# Altium PCB PCB6.PcbDoc
Units mil, origin at the board's own origin, x right, y up, seen from the top; angles counter-clockwise.
Board outline 3825 x 3825.88 mil, 2 copper layers (Top Layer, Bottom Layer); 29 components, 25 nets, 100 pads, 8 vias.
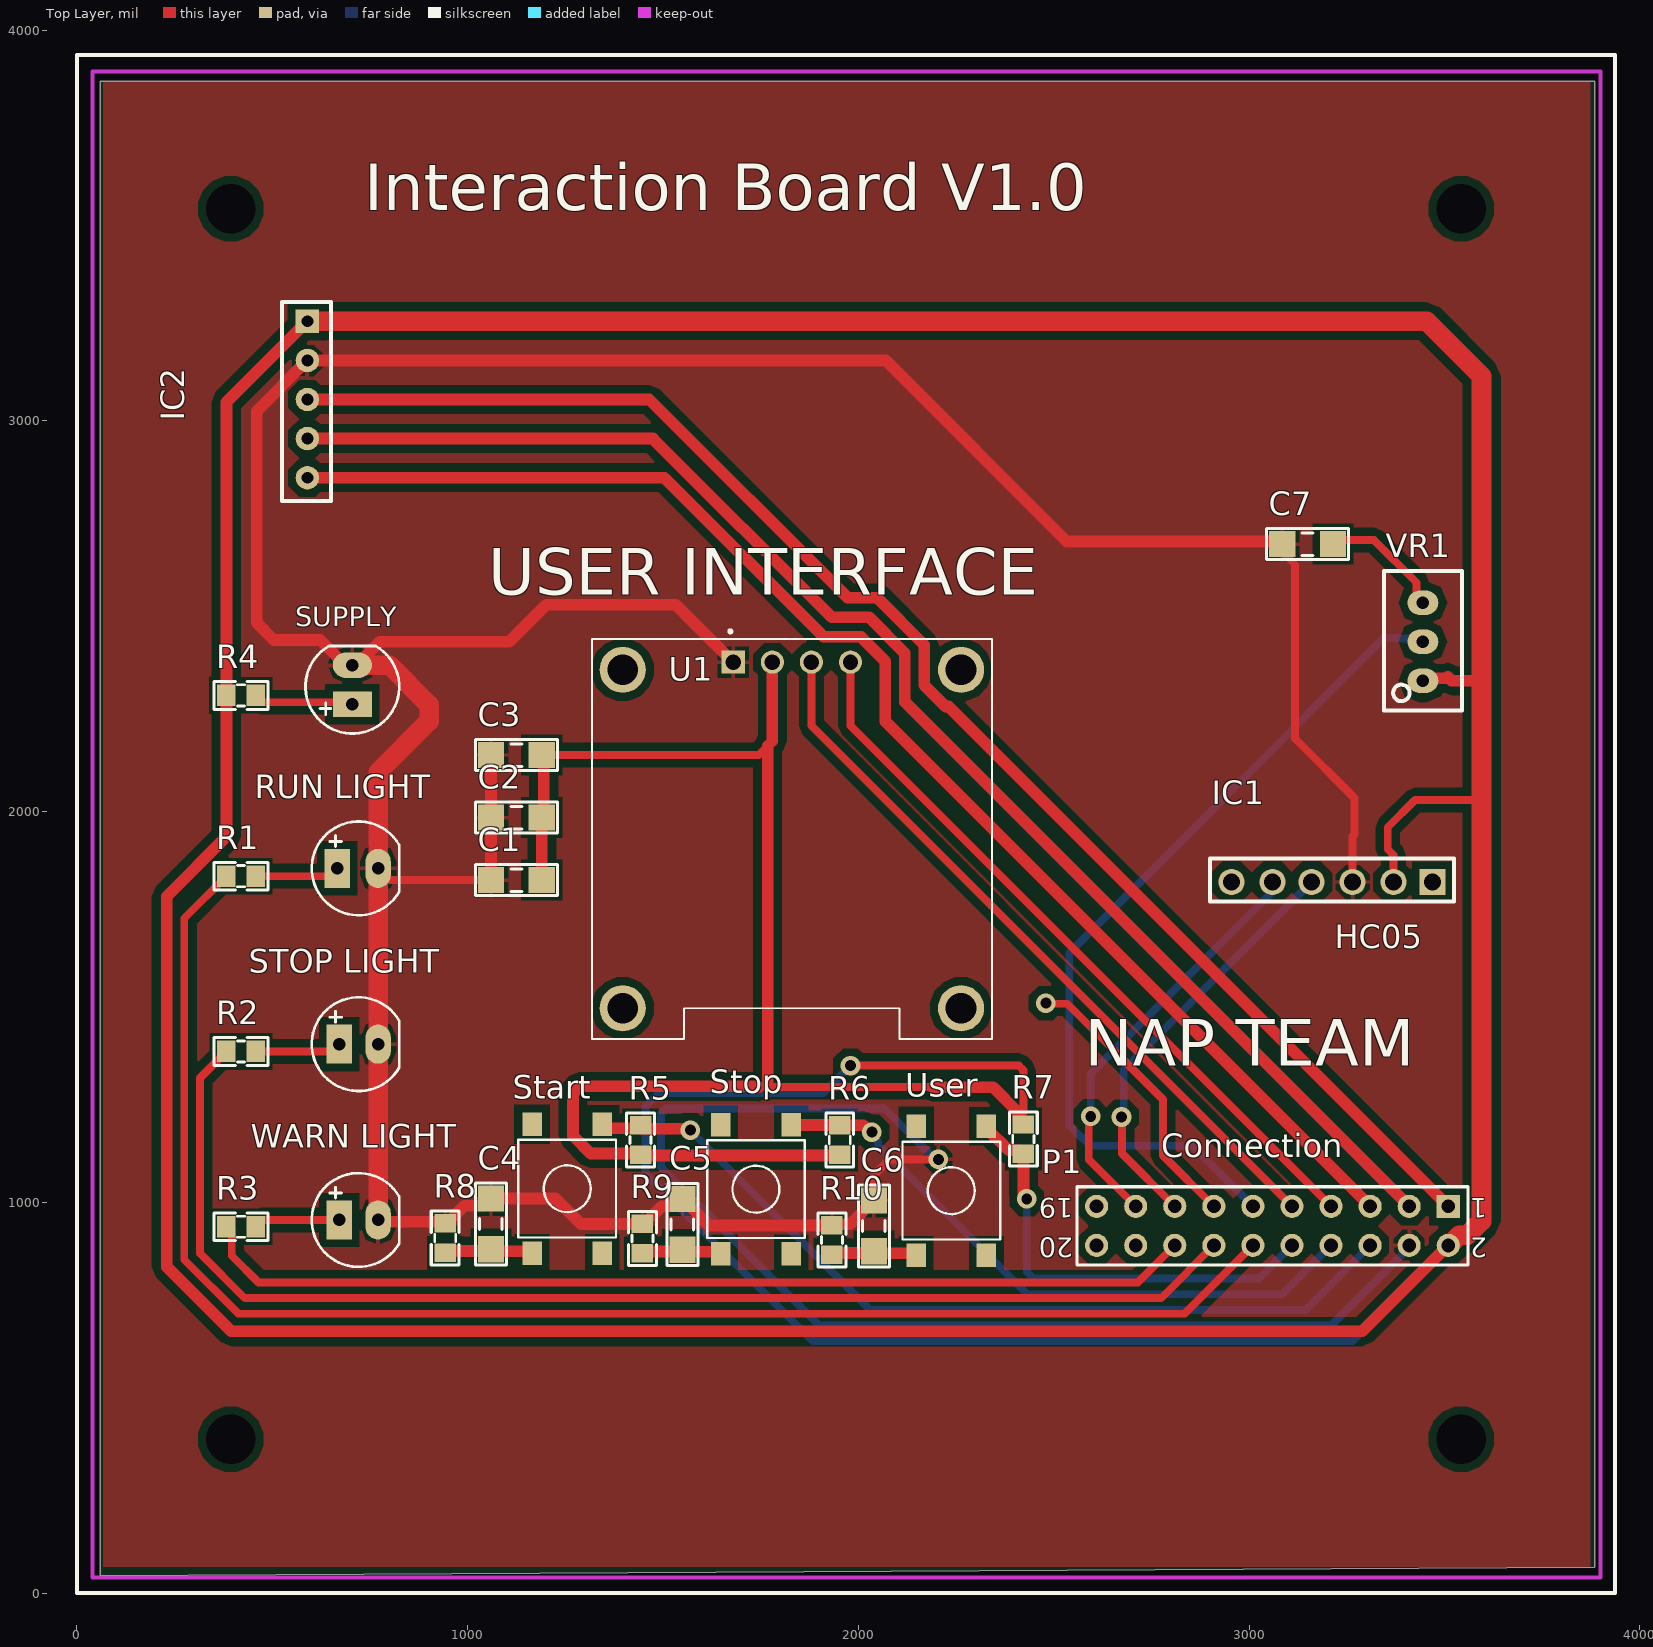
[diagram p0: Top Layer view]
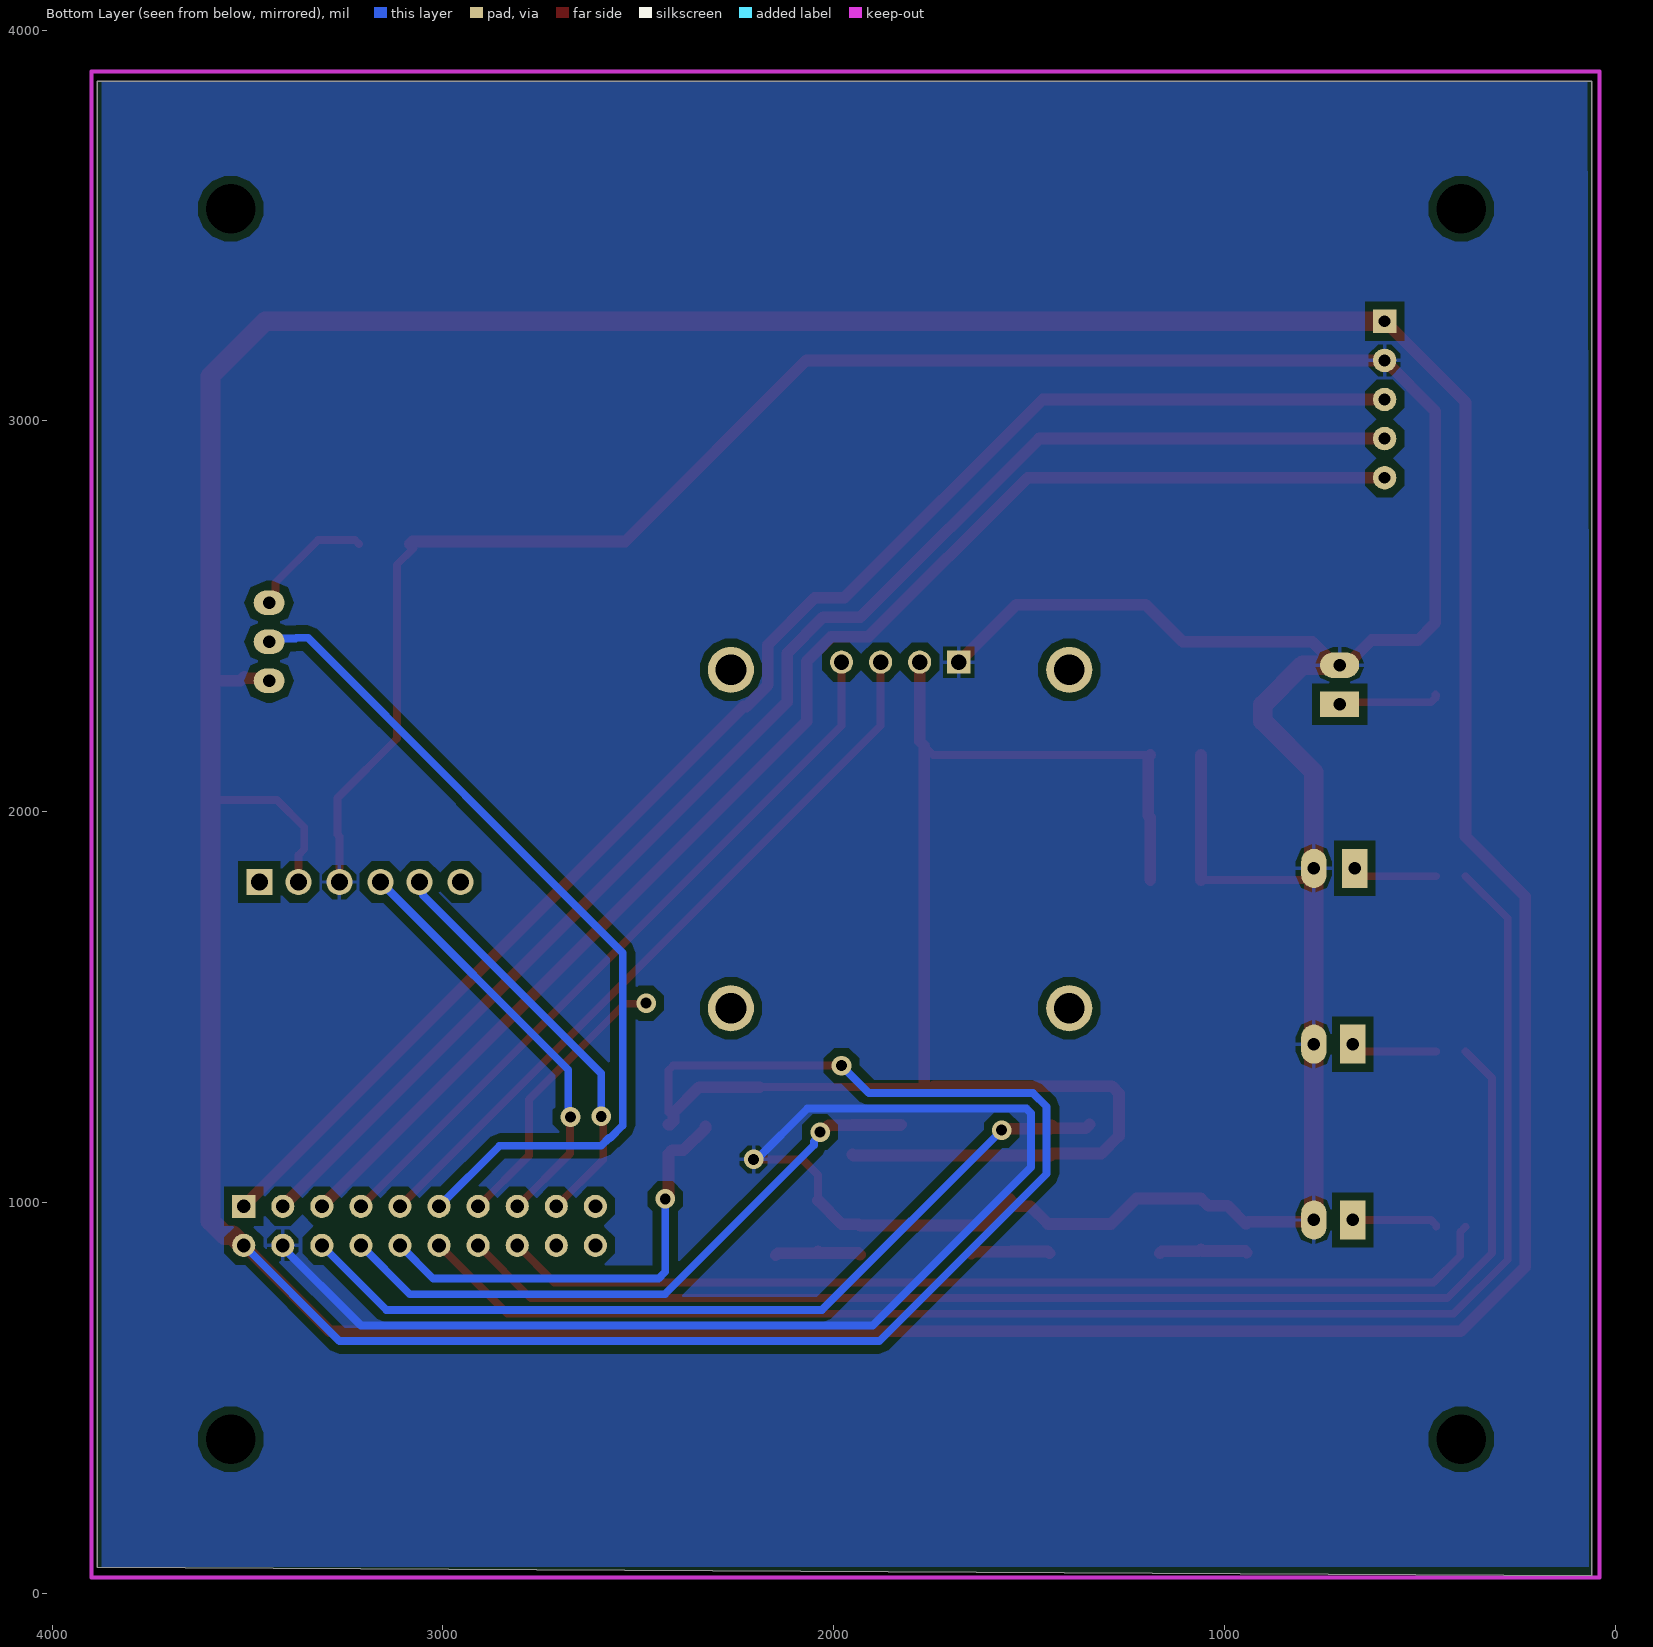
[diagram p1: Bottom Layer view, seen from below]
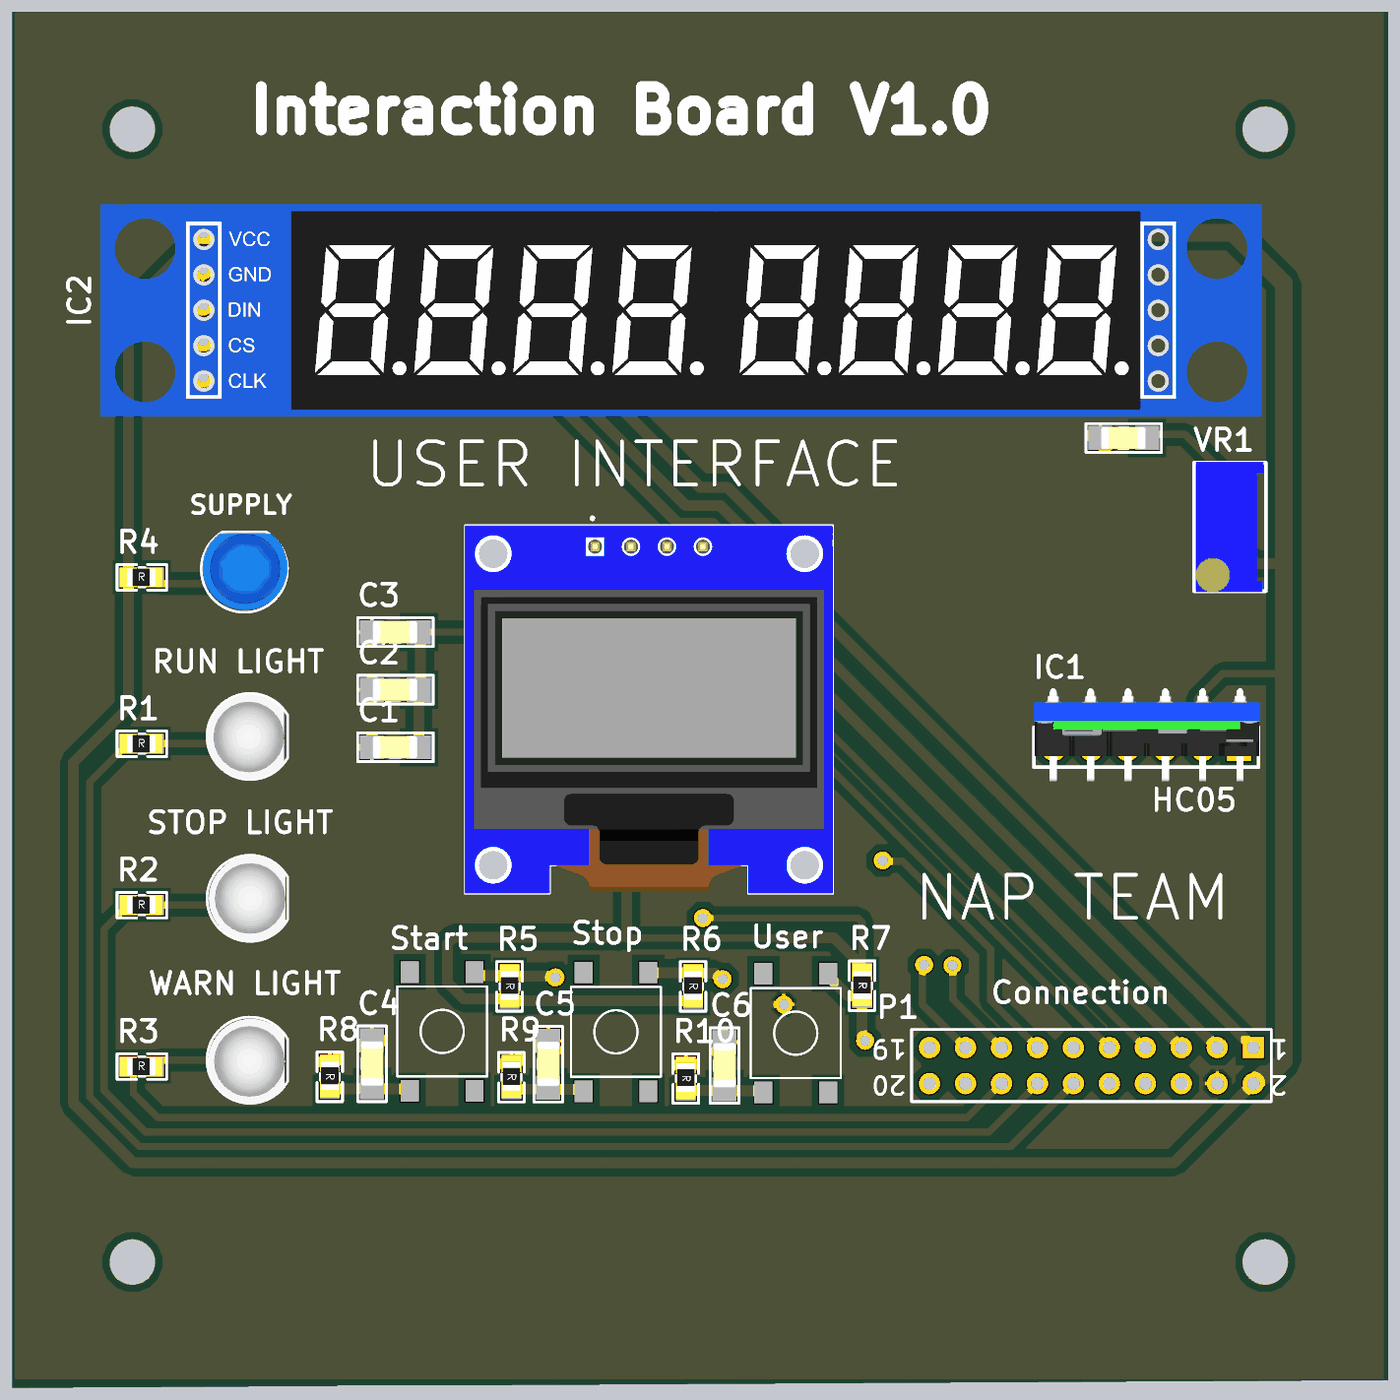
[diagram p2: 3D render of the assembled board from above, using the file's embedded part models]

## Layer stack, top to bottom
Top Solder: solder mask 0.4, Solder Resist, Dk 3.5
Top Layer: signal copper 1.4
Dielectric 1: dielectric 12.6, FR-4, Dk 4.8
Bottom Layer: signal copper 1.4
Bottom Solder: solder mask 0.4, Solder Resist, Dk 3.5

## Board outline
60,44.12 60,3870 3885,3870 3885,65.57

## Design rules (kind name [scope] priority, off if disabled: settings)
Clearance [All] p1: gap=20 ignorepadtopadclearanceinfootprint=FALSE
Height [All] p1: minheight=0 maxheight=3937.01 prefheight=500
PolygonConnect [All] p1: connectstyle=Relief reliefconductorwidth=10 reliefentries=4 polygonreliefangle="90 Angle" airgapwidth=10
RoutingVias [All] p1: holewidth=28 width=50 viastyle="Through Hole" minholewidth=28 minwidth=50 maxholewidth=28 maxwidth=50
SolderMaskExpansion [All] p1: expansion=4 istentingtop=FALSE
Width [All] p1: maxlimit=50 minlimit=20 preferedwidth=30
29 further rules are at their usual default settings.

## Components (designator, comment, footprint, x,y, rotation, side; value= is the part's Value field where it differs from the comment)
C1 "103" "tu 1206" 1125,1825 r180 top
C2 "103" "tu 1206" 1125,1985 r180 top
C3 "103" "tu 1206" 1125,2145 r180 top
C4 "103" "tu 1206" 1060,944.94 r90 top
C5 "103" "tu 1206" 1550,943.77 r90 top
C6 "103" "tu 1206" 2040,940 r90 top
C7 "103" "tu 1206" 3150,2685 r180 top
IC1 "HC05" HC05 3470,1820 r270 top
IC2 "Component_1" PCBComponent_1 590,3255 r0 top
P1 "Header 10X2" HDR2X10 3510,990 r180 top
R1 "330R" "Tro SMD 0805" 420,1837.39 r0 top
R2 "330R" "Tro SMD 0805" 420,1388.7 r0 top
R3 "330R" "Tro SMD 0805" 420,940 r0 top
R4 "330R" "Tro SMD 0805" 420,2300 r0 top
R5 "3.3k" "tro smd 0805" 1445,1160 r270 top
R6 "3.3k" "tro smd 0805" 1955,1160 r270 top
R7 "3.3k" "tro smd 0805" 2425,1162.17 r270 top
R8 "100R" "tro smd 0805" 945,908.83 r270 top
R9 "100R" "tro smd 0805" 1450,907.67 r270 top
R10 "100R" "tro smd 0805" 1935,903.9 r270 top
"RUN LIGHT" "LED 5mm" LED-5MM-Green 671,1855 r0 top
Start "Nut Nhan 4 Chan SMD 6x6" "Nut Nhan 4 Chan SMD 6x6" 1255,1035 r90 top
Stop "Nut Nhan 4 Chan SMD 6x6" "Nut Nhan 4 Chan SMD 6x6" 1738,1033.83 r90 top
"STOP LIGHT" "LED 5mm" LED-5MM-RED 671,1405 r0 top
SUPPLY "LED 5mm" LED-5MM-BLUE 705,2320 r90 top
U1 "DM-OLED096-636" MODULE_DM-OLED096-636 1830,1930 r0 top
User "Nut Nhan 4 Chan SMD 6x6" "Nut Nhan 4 Chan SMD 6x6" 2238,1030.06 r90 top
VR1 "1K" "Bien Tro Vi Chinh Dung" 3445,2435 r90 top
"WARN LIGHT" "LED 5mm" LED-5MM-Yellow 671,955 r0 top

## Footprints (in the part's own frame and the unit in brackets; to place one, negate y for a bottom-side part, rotate by r counter-clockwise, add the part's x,y. Pads: shape width x height; smd on the part's side, far side on the other; paste and mask are expansions set on the pad)
"Bien Tro Vi Chinh Dung" [mm] "Bien tro vi chinh"
  oval 1.6x2 hole 0.8: 1(-2.54,0) 2(0,0) 3(2.54,0)
  silkscreen extent -4.47,-2.54 4.6,2.54, body extent -4.54,-2.4 4.66,2.4, height 12.02
HC05 [mm]
  rect 1.7x1.7 hole 1.1: 1(0,0)
  round 1.7 hole 1.1: 2(0,-2.54) 3(0,-5.207) 4(0,-7.874) 5(0,-10.414) 6(0,-13.081)
  silkscreen extent -1.52,-14.48 1.27,1.4, body extent -4.29,-14.48 2.26,1.52, height 46.5
HDR2X10 [mm] "Connector; Header; 10x2 Position"
  rect 1.5x1.5 hole 0.9: 1(0,0)
  round 1.5 hole 0.9: 2(0,2.54) 3(2.54,0) 4(2.54,2.54) 5(5.08,0) 6(5.08,2.54) 7(7.62,0) 8(7.62,2.54) 9(10.16,0) 10(10.16,2.54) 11(12.7,0) 12(12.7,2.54) 13(15.24,0) 14(15.24,2.54) 15(17.78,0) 16(17.78,2.54) 17(20.32,0) 18(20.32,2.54) 19(22.86,0) 20(22.86,2.54)
  silkscreen extent -1.27,-1.27 24.13,3.81
LED-5MM-BLUE [mil] "LED 2 PIN, 5 ly , Only colour, pin to pin 110mil"
  rect 65x100 hole 32: 1(-45,0)
  oval 65x100 hole 32: 2(55,0)
  silkscreen extent -120,-120 104,120, body extent -113,-120 100,117, height 339
LED-5MM-Green [mil] "LED 2 PIN, 5 ly , Only colour,pin to pin 100mil"
  rect 65x100 hole 32: 1(-5,0)
  oval 65x100 hole 32: 2(100,0)
  silkscreen extent -70,-120 154,120, body extent -69,-120 145,117, height 339
LED-5MM-RED [mil] "LED 2 PIN, 5 ly , Only colour,pin to pin 100mil"
  rect 65x100 hole 32: 1(0,0)
  oval 65x100 hole 32: 2(100,0)
  silkscreen extent -70,-120 154,120, body extent -65,-119 149,118, height 339
LED-5MM-Yellow [mil] "LED 2 PIN, 5 ly , Only colour,pin to pin 100mil"
  rect 65x100 hole 32: 1(0,0)
  oval 65x100 hole 32: 2(100,0)
  silkscreen extent -70,-120 154,120, body extent -67,-122 147,115, height 339
MODULE_DM-OLED096-636 [mm]
  rect 1.508x1.508 / inner round 1.508 / far side rect 1.508x1.508 hole 1: 1(-3.81,11.5)
  round 1.508 hole 1: 2(-1.27,11.5) 3(1.27,11.5) 4(3.81,11.5)
  round 3 hole 2: S1(-11,11) S2(11,11) S3(11,-11) S4(-11,-11)
  silkscreen extent -13,-13 13,13.6, body extent -13,-13 13,13, height 5.66
"Nut Nhan 4 Chan SMD 6x6" [mil] "SW SMD button 4pin, 250 x250 mil"
  rect 60x50 smd: 1(-165,90) 2(165,-90) 3(165,90) 4(-165,-90)
  silkscreen extent -125,-125 125,125, body extent -180,-125 180,125, height 130
PCBComponent_1 [mil]
  round 60 hole 30: CLK(0,-400) CS(0,-300) DIN(0,-200) GND(0,-100)
  rect 60x60 hole 30: VCC(0,0)
  silkscreen extent -65,-460 60,50, body extent -285,-510 2943,80, height 484
"Tro SMD 0805" [mm]
  rect 1.2x1.4 smd: 1(-0.946,-0.061) 2(0.954,-0.061)
  silkscreen extent -1.75,-0.97 1.75,0.84, body extent -1.56,-0.76 1.44,0.64, height 0.53
"tro smd 0805" [mm]
  rect 1.2x1.4 smd: 1(-0.946,-0.061) 2(0.954,-0.061)
  silkscreen extent -1.75,-0.97 1.75,0.84, body extent -1.56,-0.76 1.44,0.64, height 0.53
"tu 1206" [mm]
  rect 1.7x1.7 smd: 1(-1.65,0) 2(1.65,0)
  silkscreen extent -2.67,-1.02 2.67,1.02, body extent -1.57,-0.8 1.63,0.8, height 0.94

## Part data
C1 C2 C3 C4 C5 C6 C7: library part "Tu 1206 103 50V 10%", "Dán", Chung_Loai=Dán, Don_Vi=Con, Ma_Hang=MH004543, So_Chan=2, Ten_Linh_Kien="Tụ 1206 103-10nF 10% 50V"
IC2: "Max 7219 7 segment"
P1: "Header, 10-Pin, Dual row", LatestRevisionDate=17-Jul-2002, LatestRevisionNote="Re-released for DXP Platform.", Publisher="Altium Limited"
R1 R2 R3 R4: library part "Tro 0805 5% 330R", "Dán", Chung_Loai=Dán, Don_Vi=Con, Ma_Hang=MH005337, So_Chan=2, Ten_Linh_Kien="Trở 0805 5% 330R"
R5 R6 R7: library part "Tro 0805 5% 3.3k", "Dán", Chung_Loai=Dán, Don_Vi=Con, Ma_Hang=MH005305, So_Chan=2, Ten_Linh_Kien="Trở 0805 5% 3.3k"
R8 R9 R10: library part "Tro 0805 5% 100R", "Dán", Chung_Loai=Dán, Don_Vi=Con, Ma_Hang=MH005251, So_Chan=2, Ten_Linh_Kien="Trở 0805 5% 100R"
"RUN LIGHT": library part "LED 5mm Xanh La", "Cắm", Chung_Loai=Cắm, Don_Vi=Con, Ma_Hang=MH008969, Ten_Linh_Kien="LED 5MM Phủ Xanh (1000c)"
Start Stop User: "Nut Nhan 4 Chan 6.2x6.2x3.5", Ma_Hang=MH002424, Ten="Nút Nhấn 4 Chân 6.2x6.2x3.1MM SMD"
"STOP LIGHT": library part "LED 5mm Do", "Cắm", Chung_Loai=Cắm, Don_Vi=Con, Ma_Hang=MH008967, Ten_Linh_Kien="Led 5MM Phủ Đỏ (1000c)"
SUPPLY: library part "LED 5mm Xanh Duong", "Cắm", Chung_Loai=Cắm, Don_Vi=Con, Ma_Hang=MH008987, Ten_Linh_Kien="Led 5MM Xanh Dương Đục (1000c)"
U1: "0.96â€ 128 X 64 MONOCHROME GRAPHIC OLED DISPLAY MODULE - I2C", Package=Package, Check_prices=https://www.snapeda.com/parts/DM-OLED096-636/Display+Module/view-part/?ref=eda, MF="Display Module", MP=DM-OLED096-636, SnapEDA_Link=https://www.snapeda.com/parts/DM-OLED096-636/Display+Module/view-part/?ref=snap
VR1: library part "Bien Tro Tinh Chinh 1K Dung", "Cắm", Chung_Loai=Cắm, Don_Vi=Con, Ma_Hang=MH003234, Ten_Linh_Kien="Biến Trở VR 102-1K 3296W"
"WARN LIGHT": library part "LED 5mm Vang", "Cắm", Chung_Loai=Cắm, Don_Vi=Con, Ma_Hang=MH008968, Ten_Linh_Kien="Led 5MM Phủ Vàng (1000c)"

## Free pads (board coordinates)
  round 60 hole 125.98: 2(393.7,393.7) 2(393.7,3543.31) 2(3543.31,393.7) 2(3543.31,3543.31)

## Via types
v1: diameter 50, hole 28, Top Layer to Bottom Layer, 8 vias

## Nets (pads, with @x,y where several pads share a name; then routed paths per layer and width w, separated by ;. In a path a pad name is that pad's centre, name@x,y a point inside that pad or via, vN(x,y) a via of type N, cw(c..) or ccw(c..) an arc to the next point about the centre after c; other vN are vias at no path point)
Buzzer: P1.13 | length 729.4
  Top Layer w20: v1(2480,1510) 2481.57,1508.43 2535,1508.43 2780,1263.43 2780,1120 P1.13
CLK: IC2.CLK P1.5 | length 3582.9
  Top Layer w30: IC2.CLK 1503.58,2855 1911.14,2447.44 2006.79,2447.44 2069.02,2385.22 2069.02,2230.98 P1.5
CS: IC2.CS P1.3 | length 3707.1
  Top Layer w30: IC2.CS 1474.29,2955 1931.85,2497.44 2027.5,2497.44 2119.02,2405.93 2119.02,2280.98 P1.3
Den_Run: P1.12 R1.1 | length 3891
  Top Layer w20: R1.1 275,1727.23 275,853.43 413.43,715 2835,715 P1.12
Den_Stop: P1.14 R2.1 | length 3242.9
  Top Layer w20: R2.1 315,1318.53 315,870 430,755 2775,755 P1.14
Den_Warning: P1.16 R3.1 | length 2561
  Top Layer w20: R3.1 396.39,923.98 396.39,863.61 465,795 2715,795 P1.16
DIN: IC2.DIN P1.1 | length 3835.4
  Top Layer w30: IC2.DIN 1465,3055 1972.56,2547.44 2048.21,2547.44 2169.02,2426.64 2169.02,2324.11 2224.11,2269.02 2230.98,2269.02 3495.47,1004.53 P1.1
GND: "RUN LIGHT.2" "STOP LIGHT.2" "WARN LIGHT.2" C1.2 C2.2 C3.2 C4.2 C5.2 C6.2 C7.2 IC1.3 IC2.GND P1.4 R8.1 R9.1 R10.1 SUPPLY.2 U1.1 | length 12703.7
  Top Layer w20: 771,1855 771,1849.68 791.79,1828.89 797.11,1828.89 801,1825 C1.2 ; C6.2 2040,1070 2080,1110 v1(2205,1110) ; C7.2@3075.02,2674.98 3117.95,2632.05 3117.95,2380 3117.95,2187.05 3270,2035 3270,1941.35 3265,1936.35 IC1.3
  Top Layer w30: 771,955 775.47,950.53 938.14,950.53 R8.1 946.54,946.06 991.91,991.43 1041.54,991.43 C4.2 1225.1,1009.9 1290.1,944.9 R9.1 1451.54,944.9 1496.91,990.27 1531.54,990.27 C5.2 1617.61,941.13 R10.1 1935.55,944.07 1979.11,944.07 C6.2 ; C1.2 C2.2 C3.2 ; U1.1 1532.76,2530 1201.45,2530 1106.45,2435 775.15,2435 715.15,2375 SUPPLY.2 687.5,2375 623.11,2439.39 504.23,2439.39 460,2483.61 460,3025 IC2.GND 2070,3155 2533.53,2691.47 3078.57,2691.47 C7.2
  Top Layer w50: SUPPLY.2@715.15,2375 800,2375 901.79,2273.21 901.79,2231.79 771,2101 771,1855 ; 771,955 771,1405 771,1828.89 771,1849.68
  Bottom Layer w20: v1(2205,1110) 2197.78,1110 2067.78,1240 1506.72,1240 1495,1228.28 1495,1090 1900,685 3210,685 P1.4@3420,895
Input_01: P1.6 R5.1 Start.2 | length 2239.1
  Top Layer w30: Start.2 1355,1190 1435.38,1190 R5.1 ; R5.1@1438.72,1195 1444.89,1188.83 1566.17,1188.83 v1(1570,1185)
  Bottom Layer w20: v1(1570,1185) 2030,725 3145,725 P1.6
Input_02: P1.8 R6.1 Stop.2 | length 1624
  Top Layer w30: Stop.2 1828.8,1198.03 1951.8,1198.03 R6.1 2012.36,1197.23 2029.59,1180 v1(2035,1180)
  Bottom Layer w20: v1(2035,1180) 2035,1171.88 2050.74,1156.14 2050.74,1146.26 2432,765 3085,765 P1.8
Input_03: P1.10 R7.2 User.2 | length 1153.7
  Top Layer w30: User.2 2328,1190.06 2384.85,1133.21 2413.98,1133.21 R7.2 2422.61,1017.39 v1(2431.15,1008.85)
  Bottom Layer w20: v1(2431.15,1008.85) 2431.15,822.42 2448.57,805 3025,805 P1.10
NetC4_1: C4.1 R8.2 Start.1 | length 230.1
  Top Layer w30: R8.2 946.96,875.62 1055.64,875.62 C4.1 1064.99,874.99 1160.01,874.99 Start.1
NetC5_1: C5.1 R9.2 Stop.1 | length 204.5
  Top Layer w30: R9.2 1451.96,874.45 1545.64,874.45 1546.27,873.82 1643.01,873.82 Stop.1
NetC6_1: C6.1 R10.2 User.1 | length 223.1
  Top Layer w30: R10.2 1936.96,870.68 2035.64,870.68 C6.1 2044.99,870.05 2143.01,870.05 User.1
NetC7_1: C7.1 VR1.3 | length 321
  Top Layer w20: C7.1 3224.96,2695 3320,2695 3428.9,2586.1 3428.9,2551.1 VR1.3
NetR1_2: "RUN LIGHT.1" R1.2 | length 216.7
  Top Layer w20: R1.2 646,1835 666,1855
NetR2_2: "STOP LIGHT.1" R2.2 | length 221.2
  Top Layer w20: R2.2 652.3,1386.3 671,1405
NetR3_2: "WARN LIGHT.1" R3.2 | length 222.8
  Top Layer w20: R3.2 457.57,941.38 471.2,955 671,955
NetR4_2: R4.2 SUPPLY.1 | length 263.9
  Top Layer w20: R4.2 460,2300.03 460,2291.24 471.2,2280.05 479.98,2280.05 480.03,2280 700,2280 SUPPLY.1
RX_HC05: IC1.4 P1.15 | length 1088
  Top Layer w20: v1(2673.61,1218.61) 2675,1217.22 2675,1125 P1.15
  Bottom Layer w20: v1(2673.61,1218.61) 2679.35,1224.35 2679.35,1339.35 IC1.4
SCL_Oled: P1.9 U1.3 | length 1902.2
  Top Layer w20: U1.3 1880,2220 2820,1280 P1.9
SDA_Oled: P1.7 U1.4 | length 1902.2
  Top Layer w20: U1.4 1980,2220 P1.7
TX_HC05: IC1.5 P1.17 | length 1084.4
  Top Layer w20: v1(2595,1220) 2590,1225 2590,1110 P1.17
  Bottom Layer w20: v1(2595,1220) 2595,1330 3051.02,1786.02 3051.02,1811.02 IC1.5
Var: P1.11 VR1.2 | length 2240.8
  Bottom Layer w20: P1.11 2855,1145 2595,1145 2575,1165 2572.22,1165 2540,1197.22 2540,1638.43 2942.82,2041.25 2942.82,2042.18 3345.63,2445 3375.49,2445 3377.27,2443.23 3436.77,2443.23 VR1.2
VCC: C1.1 C2.1 C3.1 IC1.2 IC2.VCC P1.2 R4.1 R5.2 R6.2 R7.1 U1.2 VR1.1 | length 19577.8
  Top Layer w20: C3.1 1745,2145 1768,2168 1780,2180 ; 1745,1295 1766,1295 2190,1295 ; v1(1980,1350) 2410.89,1350 2422.61,1338.28 2422.61,1229.95 ; IC1.2 3370,1888.85 3355,1903.85 3355,1960 3425,2030 3595,2030
  Top Layer w30: IC2.VCC 382.77,3047.77 R4.1 382.77,1935.68 230,1782.91 230,834.79 394.79,670 3290,670 P1.2 ; C1.1 C2.1 1195,1990.04 1195,2139.96 C3.1 ; 1745,1295 1743,1297 1287.57,1297 1270,1279.43 1270,1170 1315,1125 1440.03,1125 1445.03,1120 1950.18,1120 R6.2 ; 1768,1297 1768,2168 ; 1780,2180 U1.2 ; 2190,1295 2345,1295 2410.05,1229.95 2410.05,1208.02 2418.67,1199.39 R7.1 ; VR1.1 3451.31,2341.31 3504.71,2341.31 3508.4,2345 3518.4,2335 3595,2335
  Top Layer w50: IC2.VCC 3455,3255 3595,3115 3595,2335 3595,2030 3595,952.31 3558.17,915.47 3537.92,915.47 3512.45,890 P1.2
  Bottom Layer w20: v1(1980,1350) 1910,1280 1490.15,1280 1455,1244.85 1455,1073.43 1883.43,645 3265,645 P1.2
pads on no net: IC1.1 IC1.6 P1.18 P1.19 P1.20 Start.3 Start.4 Stop.3 Stop.4 U1.S1 U1.S2 U1.S3 U1.S4 User.3 User.4
copper on no net: | length 16.9
  Top Layer w20: 2602.53,997.47 2610,990 ; 2605.49,885.49 2610,890

## Polygon pours and split planes (outlines as drawn)
GND on Top Layer "GND_L01_P000" (solid, pour order 0): 60,3870 3885,3870 3885,65.57 3880,65.55 60,45
GND on Bottom Layer "GND_L02_P001" (solid, pour order 1): 71.02,3870 3895.75,3870 3895.75,818.26 3885,65.57 60,45

## Keep-outs
Keep-Out Layer:
  lines w10: 40,40 40,3895 3900,3895 3900,40 40,40

## Silkscreen, mask and mechanical layers (free items; w line width, h text height)
Top Overlay:
  lines w10: 10,0 0,0 ; 0,0 3937.01,0 3937.01,3937.01 0,3937.01 0,0
  text "Interaction Board V1.0" at 735.4,3540 h120
  text "USER INTERFACE" at 1052.45,2555 h120
  text "NAP TEAM" at 2579.1,1350 h120
  text "Connection" at 2775,1115 h60

## Text inside footprints (layer, text, board x,y; h text height)
P1: Top Overlay "2" at 3610,910 h50 r180; Top Overlay "1" at 3610,1010 h50 r180; Top Overlay "19" at 2550,1010 h50 r180; Top Overlay "20" at 2550,910 h50 r180